# Altium PCB CamController3.PcbDoc
Units mm, origin at the board's own origin, x right, y up, seen from the top; angles counter-clockwise.
Board outline 100 x 100 mm, 2 copper layers (Top Layer, Bottom Layer), stack 1.671 mm thick; 57 components, 96 nets, 410 pads, 51 vias.
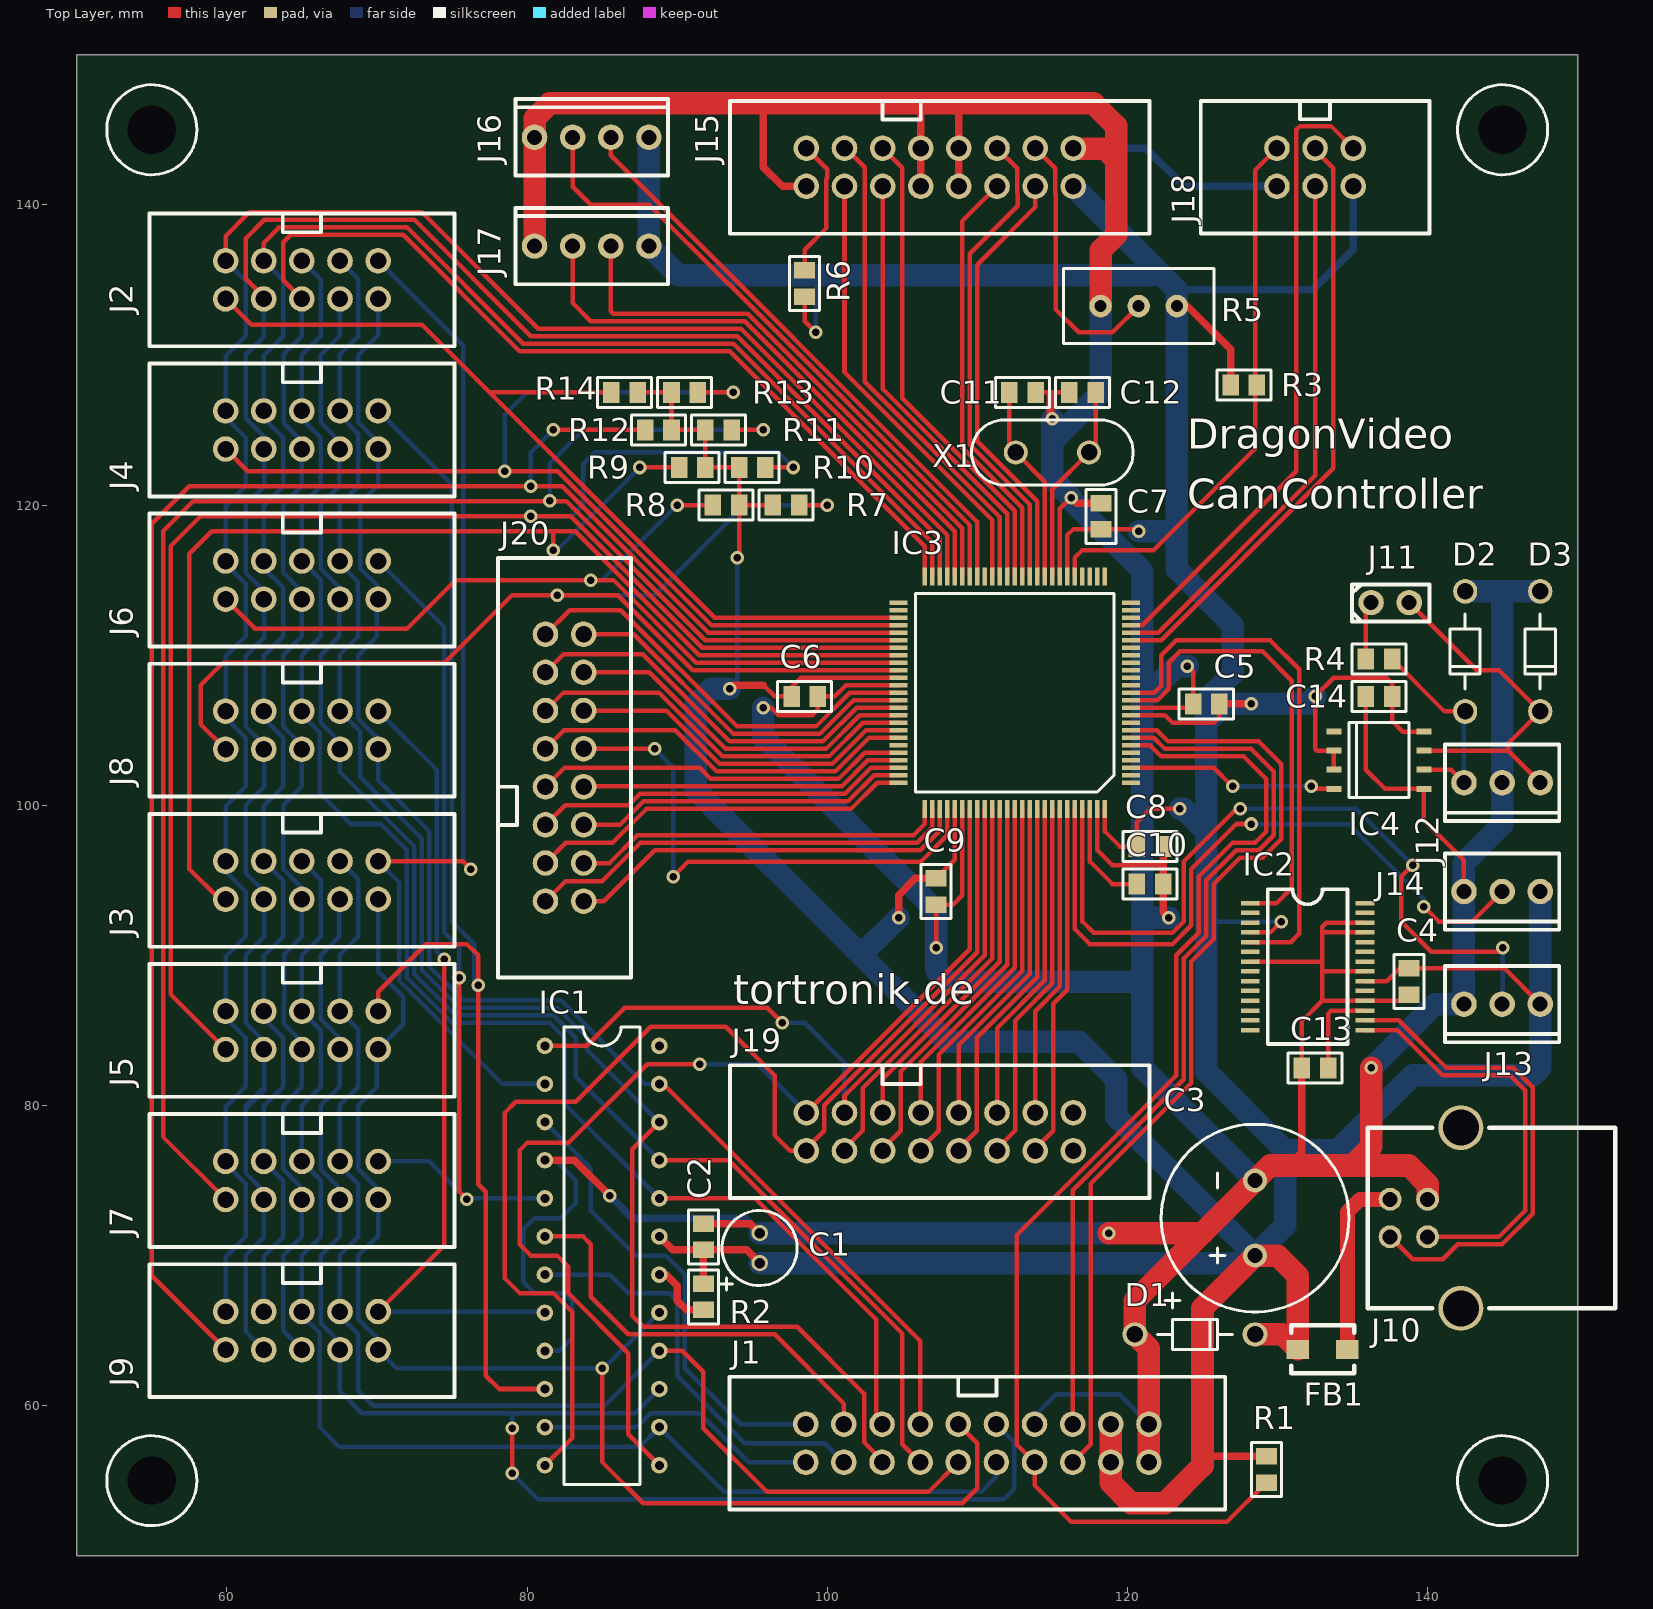
[diagram p0: Top Layer view]
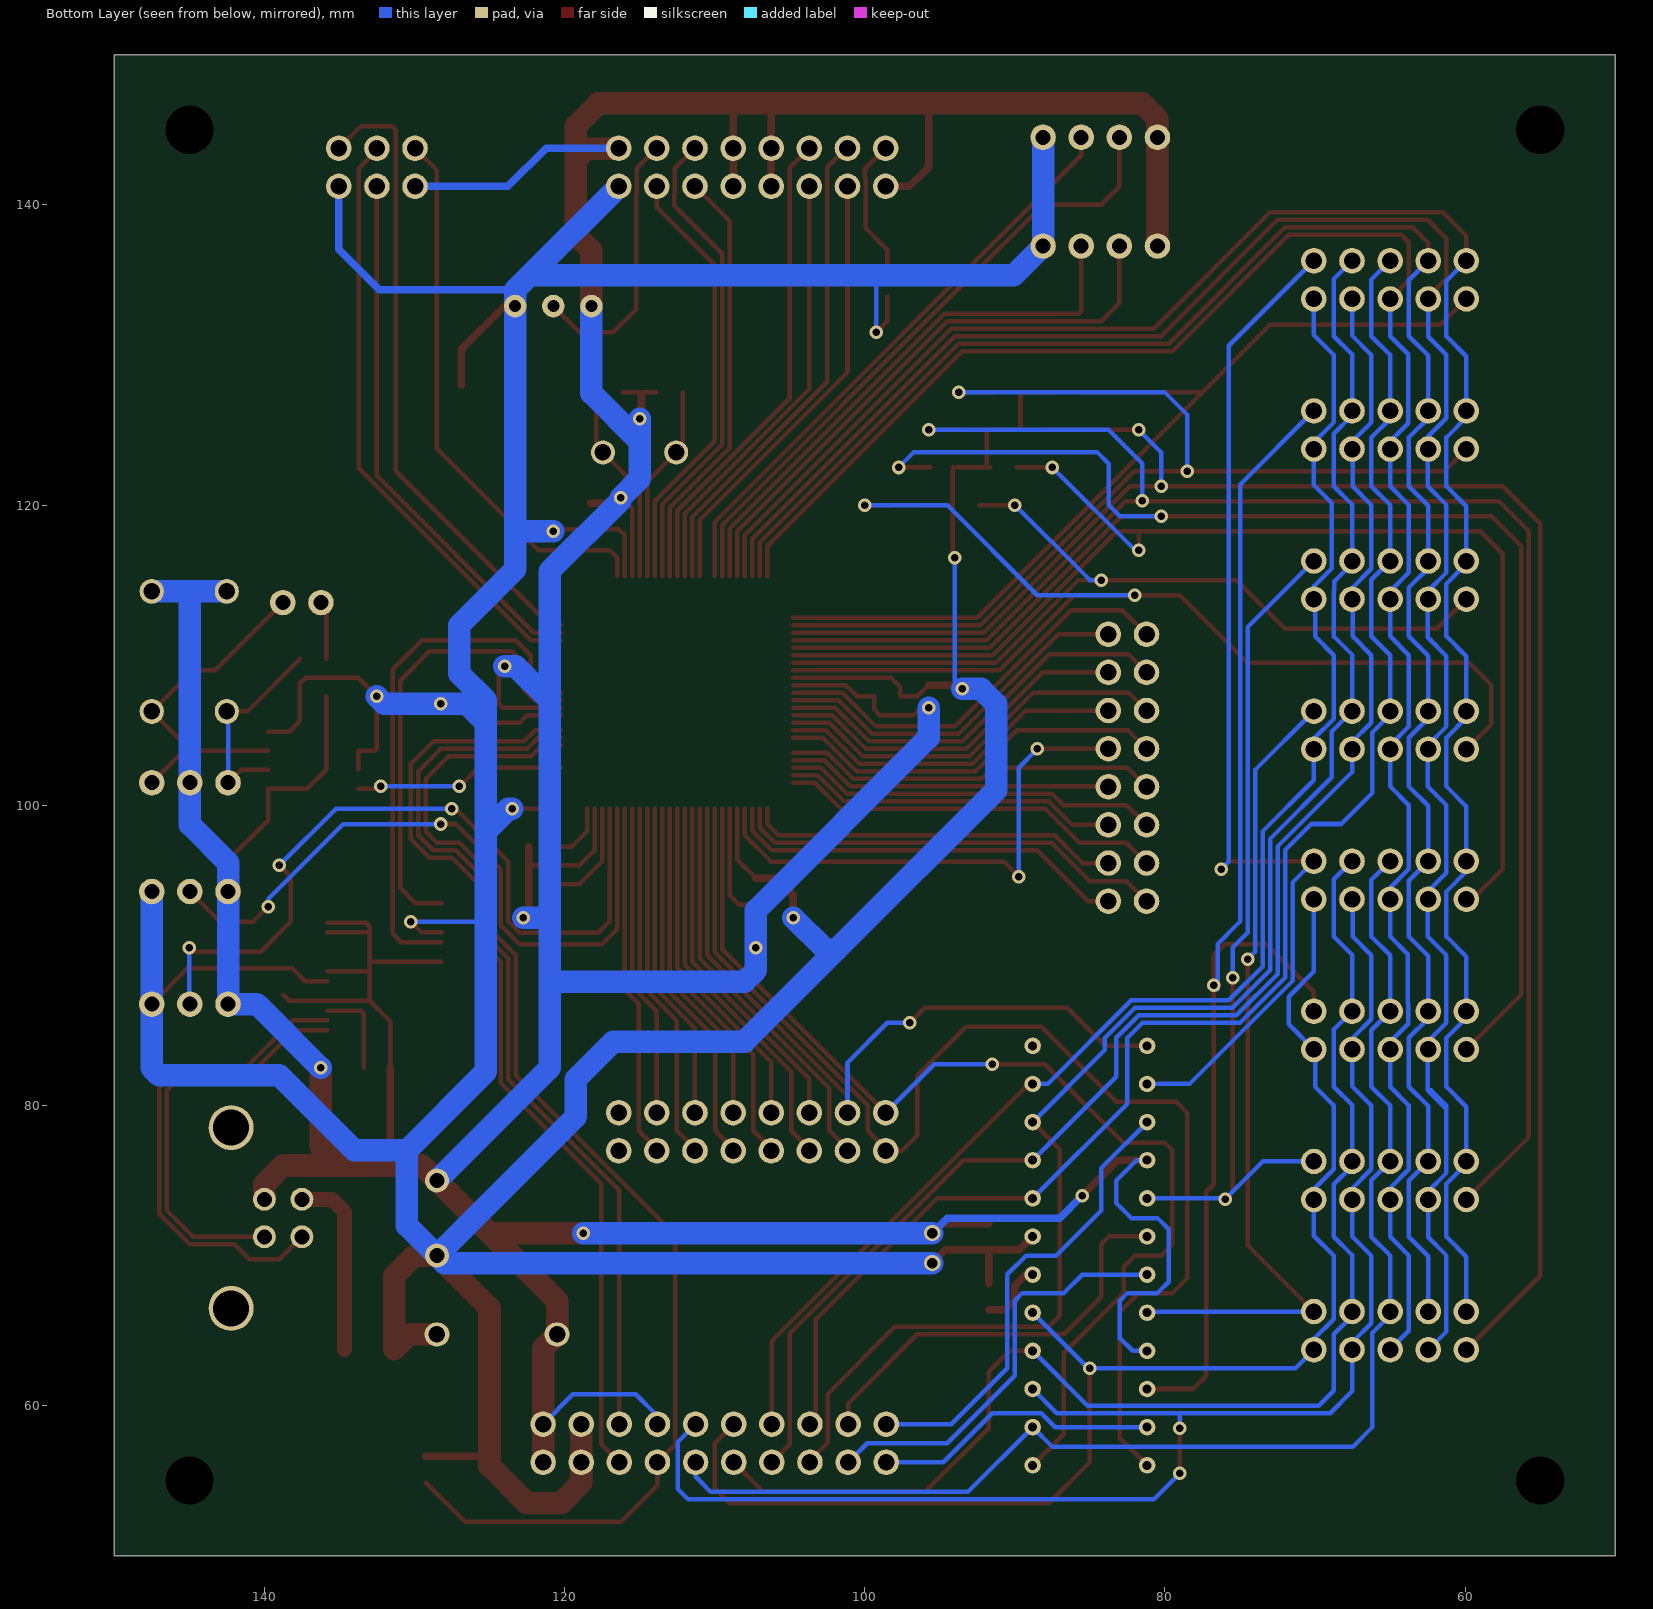
[diagram p1: Bottom Layer view, seen from below]
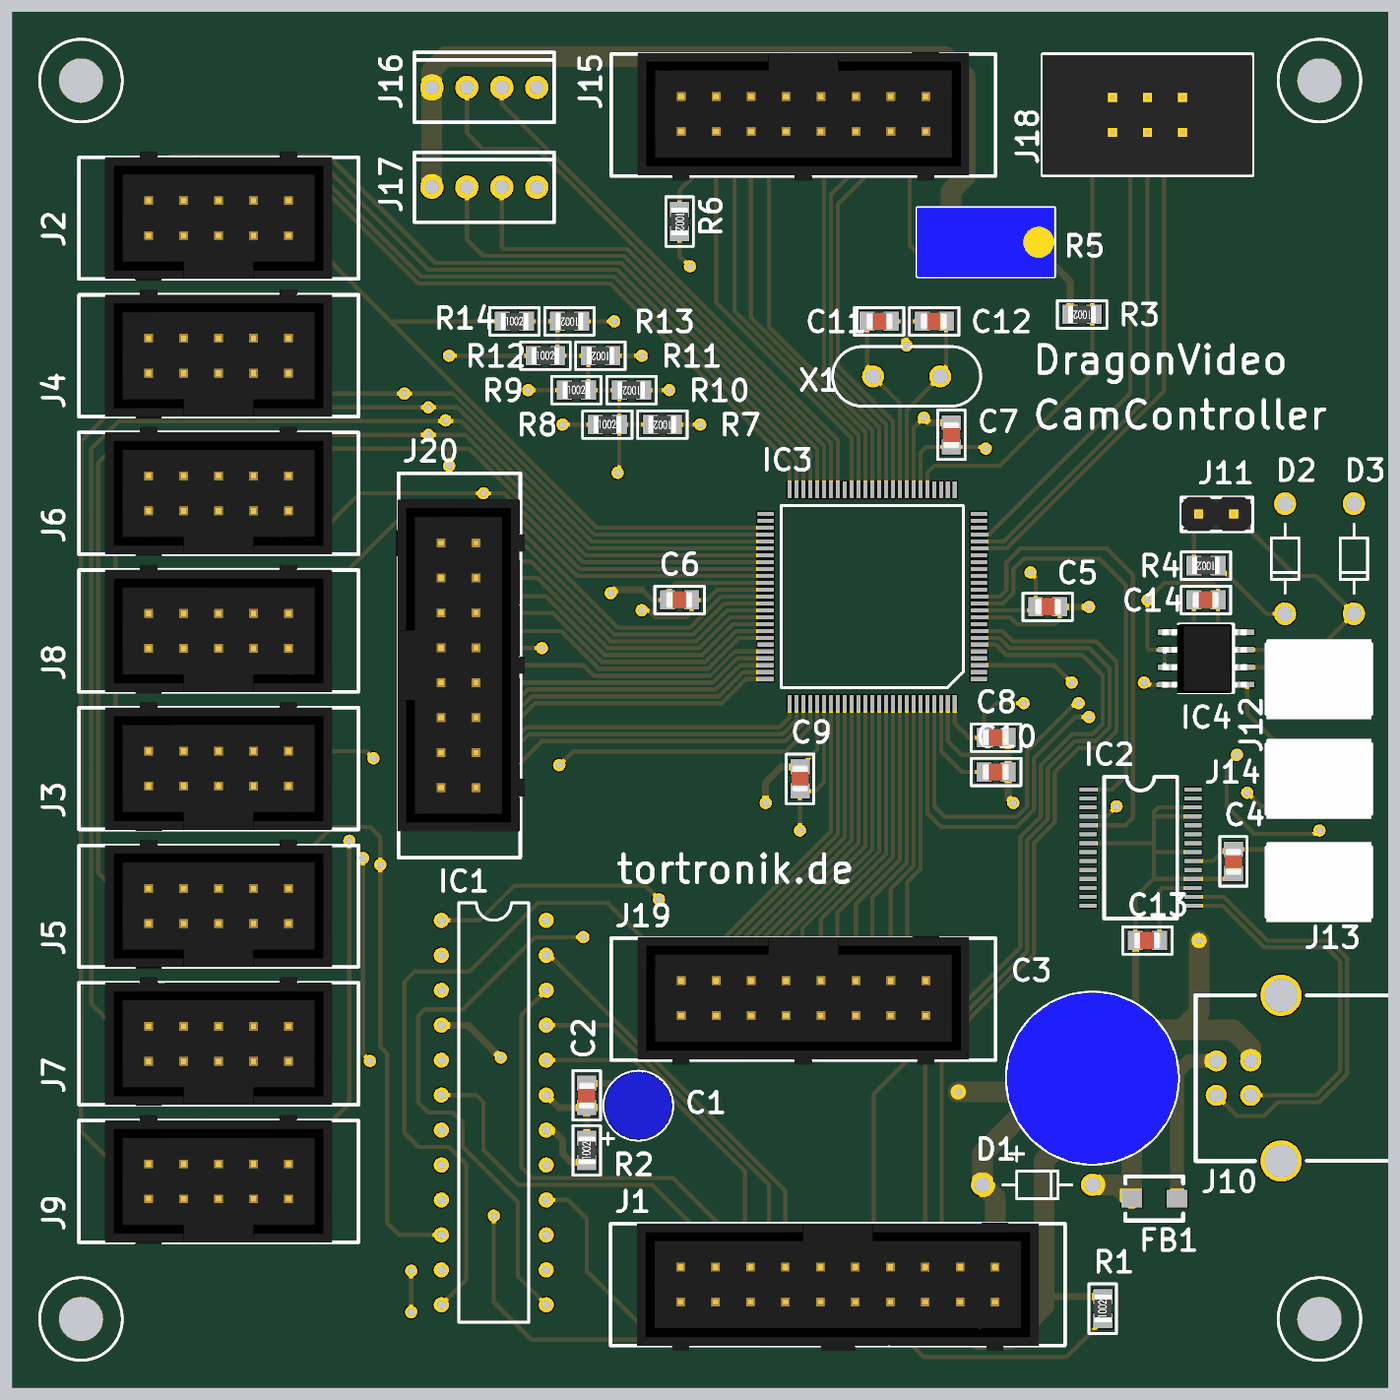
[diagram p2: 3D render of the assembled board from above, using the file's embedded part models]

## Layer stack, top to bottom
Top Solder: solder mask 0.0102, Solder Resist, Dk 3.5
Top Layer: signal copper 0.0356
Dielectric1: core 1.6, FR-4, Dk 4.8
Bottom Layer: signal copper 0.0356
Bottom Solder: solder mask 0.0102, Solder Resist, Dk 3.5

## Board outline
50,50 50,150 150,150 150,50

## Design rules (kind name [scope] priority, off if disabled: settings)
Clearance [All] p1: gap=0.2 ignorepadtopadclearanceinfootprint=FALSE except(0: Arc-Hole Track-Hole SMDPad-Hole THPad-Hole Via-Hole Fill-Hole Poly-Hole Region-Hole Text-Hole)
HoleSize [All] p1: absolutevalues=TRUE maxlimit=6 minlimit=0.25 maxpercent=80.000 minpercent=20.000
PolygonConnect [All] p1: connectstyle=Relief reliefconductorwidth=0.254 reliefentries=4 polygonreliefangle="90 Angle" airgapwidth=0.254
RoutingVias [All] p1: holewidth=0.6 width=1 viastyle="Through Hole" minholewidth=0.3 minwidth=0.6 maxholewidth=1 maxwidth=1.3
SolderMaskExpansion [All] p1: expansion=0.102
Width [All] p1: maxlimit=2 minlimit=0.15 preferedwidth=0.4
29 further rules are at their usual default settings.

## Classes and differential pairs
component class CamController3: C3 C4 C5 C6 C7 C8 C9 C10 C11 C12 C13 C14 D1 D2 D3 FB1 IC2 IC3 IC4 J10 J11 J12 J13 J14 J15 J16 J17 J18 J19 J20 R3 R4 R5 R6 R7 R8 R9 R10 R11 R12 R13 R14 X1
component class Buttoninterface: C1 C2 IC1 J1 J2 J3 J4 J5 J6 J7 J8 J9 R1 R2

## Components (designator, comment, footprint, x,y, rotation, side; value= is the part's Value field where it differs from the comment)
C1 "Elko_10uF_63V" RM2D5H11 95.5,70.5 r90 top
C2 "100nF 50V MLCC 0805" 0805 91.75,71.25 r270 top
C3 "Elko_220uF_50V" RM5D125H20 128.5,72.5 r90 top
C4 "10nF 50V MLCC 0805" 0805 138.75,88.25 r270 top
C5 "100nF 50V MLCC 0805" 0805 125.25,106.75 r0 top
C6 "100nF 50V MLCC 0805" 0805 98.5,107.25 r180 top
C7 "100nF 50V MLCC 0805" 0805 118.25,119.25 r270 top
C8 "100nF 50V MLCC 0805" 0805 121.5,97.25 r180 top
C9 "100nF 50V MLCC 0805" 0805 107.25,94.25 r90 top
C10 "100nF 50V MLCC 0805" 0805 121.5,94.75 r180 top
C11 "22pF 50V MLCC 0805" 0805 113,127.5 r0 top
C12 "22pF 50V MLCC 0805" 0805 117,127.5 r180 top
C13 "100nF 50V MLCC 0805" 0805 132.5,82.5 r180 top
C14 "100nF 50V MLCC 0805" 0805 136.75,107.25 r180 top
D1 "ZD-5W 5,1V" DO-204AF 124.5,64.75 r180 top
D2 "ZD-5W 5,1V" DO-204AF 142.5,110.25 r90 top
D3 "ZD-5W 5,1V" DO-204AF 147.5,110.25 r90 top
FB1 "Feritbead" Ferritbead 133,63.75 r180 top
IC1 "MAX7221" DIL28 85,70 r0 top
IC2 "FT232RL" SSOP-28 132,89.25 r270 top
IC3 "ATMega1280" LQFP100 112.5,107.5 r180 top
IC4 "MAX485CSA" SOIC8 136.75,103 r270 top
J1 "Wannenstecker 20pol 2,54mm" WSL20G 110,57.5 r180 top
J2 "Wannenstecker 10pol 2,54mm" WSL10G 65,135 r180 top
J3 "Wannenstecker 10pol 2,54mm" WSL10G 65,95 r180 top
J4 "Wannenstecker 10pol 2,54mm" WSL10G 65,125 r180 top
J5 "Wannenstecker 10pol 2,54mm" WSL10G 65,85 r180 top
J6 "Wannenstecker 10pol 2,54mm" WSL10G 65,115 r180 top
J7 "Wannenstecker 10pol 2,54mm" WSL10G 65,75 r180 top
J8 "Wannenstecker 10pol 2,54mm" WSL10G 65,105 r180 top
J9 "Wannenstecker 10pol 2,54mm" WSL10G 65,65 r180 top
J10 "USB B" USB_B 137.5,72.5 r90 top
J11 "SL 1X2G 2,54" "SL_1x2 2.54mm" 137.5,113.5 r0 top
J12 "PSS 254/3G" "PSS 3pol" 147.5,101.5 r180 top
J13 "PSS 254/3G" "PSS 3pol" 147.5,86.75 r180 top
J14 "PSS 254/3G" "PSS 3pol" 147.5,94.25 r180 top
J15 "Wannenstecker 16pol 2,54mm" WSL16G 107.5,142.5 r180 top
J16 "PSS 254/4G" "PSS 4pol" 80.5,144.5 r0 top
J17 "PSS 254/4G" "PSS 4pol" 80.5,137.25 r0 top
J18 "Wannenstecker 6pol 2,54mm" WSL6G 132.5,142.5 r180 top
J19 "Wannenstecker 16pol 2,54mm" WSL16G 107.5,78.25 r180 top
J20 "Wannenstecker 16pol 2,54mm" WSL16G 82.5,102.5 r270 top
R1 "10K 125mW 0805" res0805 129.25,55.75 r90 top
R2 "27k 125mW 0805" res0805 91.75,67.25 r90 top
R3 "10K 125mW 0805" res0805 127.75,128 r180 top
R4 "120R 125mW 0805" res0805 136.75,109.75 r180 top
R5 "12Turn" 64W 120.75,133.25 r0 top
R6 "15R 125mW 0805" res0805 98.5,134.75 r270 top
R7 "4k7 125mW 0805" res0805 97.25,120 r180 top
R8 "4k7 125mW 0805" res0805 93.25,120 r0 top
R9 "4k7 125mW 0805" res0805 91,122.5 r0 top
R10 "4k7 125mW 0805" res0805 95,122.5 r180 top
R11 "4k7 125mW 0805" res0805 92.75,125 r180 top
R12 "4k7 125mW 0805" res0805 88.75,125 r0 top
R13 "4k7 125mW 0805" res0805 90.5,127.5 r180 top
R14 "4k7 125mW 0805" res0805 86.5,127.5 r0 top
X1 "8Mhz_HC49U" HC49 115,123.5 r0 top

## Footprints (in the part's own frame and the unit in brackets; to place one, negate y for a bottom-side part, rotate by r counter-clockwise, add the part's x,y. Pads: shape width x height; smd on the part's side, far side on the other; paste and mask are expansions set on the pad)
64W [mm]
  round 1.5 hole 0.8: 1(-2.54,0) 2(0,0) 3(2.54,0)
  silkscreen extent -5,-2.5 5,2.5, body extent -5,-2.5 5,2.5, height 11.5
0805 [mm]
  rect 1.1x1.4 smd: 1(-0.875,0) 2(0.875,0)
  silkscreen extent -1.8,-1 1.8,1, body extent -0.97,-0.62 1.03,0.62, height 0.78
DIL28 [mm]
  round 1.1 hole 0.6: 1(-3.81,13.97) 2(-3.81,11.43) 3(-3.81,8.89) 4(-3.81,6.35) 5(-3.81,3.81) 6(-3.81,1.27) 7(-3.81,-1.27) 8(-3.81,-3.81) 9(-3.81,-6.35) 10(-3.81,-8.89) 11(-3.81,-11.43) 12(-3.81,-13.97) 13(3.81,-13.97) 14(3.81,-11.43) 15(3.81,-8.89) 16(3.81,-6.35) 17(3.81,-3.81) 18(3.81,-1.27) 19(3.81,1.27) 20(3.81,3.81) 21(3.81,6.35) 22(3.81,8.89) 23(3.81,11.43) 24(3.81,13.97)
  silkscreen extent -2.54,-15.24 2.54,15.24
DO-204AF [mm]
  oval 1.66x1.6 hole 1.1: 1(-4,0) 2(4,0)
  silkscreen extent -2.5,-1 2.5,1
Ferritbead [mm]
  rect 1.5x1.27 smd: 1(-1.65,0) 2(1.65,0)
  silkscreen extent -2.1,-1.6 2.1,1.6
HC49 [mm]
  round 1.6 hole 1.1: 1(-2.44,0) 2(2.44,0)
  silkscreen extent -5.38,-2.17 5.38,2.17
LQFP100 [mm]
  rect 1.2x0.3 smd: 1(-7.75,6) 2(-7.75,5.5) 3(-7.75,5) 4(-7.75,4.5) 5(-7.75,4) 6(-7.75,3.5) 7(-7.75,3) 8(-7.75,2.5) 9(-7.75,2) 10(-7.75,1.5) 11(-7.75,1) 12(-7.75,0.5) 13(-7.75,0) 14(-7.75,-0.5) 15(-7.75,-1) 16(-7.75,-1.5) 17(-7.75,-2) 18(-7.75,-2.5) 19(-7.75,-3) 20(-7.75,-3.5) 21(-7.75,-4) 22(-7.75,-4.5) 23(-7.75,-5) 24(-7.75,-5.5) 25(-7.75,-6) 51(7.75,-6) 52(7.75,-5.5) 53(7.75,-5) 54(7.75,-4.5) 55(7.75,-4) 56(7.75,-3.5) 57(7.75,-3) 58(7.75,-2.5) 59(7.75,-2) 60(7.75,-1.5) 61(7.75,-1) 62(7.75,-0.5) 63(7.75,0) 64(7.75,0.5) 65(7.75,1) 66(7.75,1.5) 67(7.75,2) 68(7.75,2.5) 69(7.75,3) 70(7.75,3.5) 71(7.75,4) 72(7.75,4.5) 73(7.75,5) 74(7.75,5.5) 75(7.75,6)
  rect 0.3x1.2 smd: 26(-6,-7.75) 27(-5.5,-7.75) 28(-5,-7.75) 29(-4.5,-7.75) 30(-4,-7.75) 31(-3.5,-7.75) 32(-3,-7.75) 33(-2.5,-7.75) 34(-2,-7.75) 35(-1.5,-7.75) 36(-1,-7.75) 37(-0.5,-7.75) 38(0,-7.75) 39(0.5,-7.75) 40(1,-7.75) 41(1.5,-7.75) 42(2,-7.75) 43(2.5,-7.75) 44(3,-7.75) 45(3.5,-7.75) 46(4,-7.75) 47(4.5,-7.75) 48(5,-7.75) 49(5.5,-7.75) 50(6,-7.75) 76(6,7.75) 77(5.5,7.75) 78(5,7.75) 79(4.5,7.75) 80(4,7.75) 81(3.5,7.75) 82(3,7.75) 83(2.5,7.75) 84(2,7.75) 85(1.5,7.75) 86(1,7.75) 87(0.5,7.75) 88(0,7.75) 89(-0.5,7.75) 90(-1,7.75) 91(-1.5,7.75) 92(-2,7.75) 93(-2.5,7.75) 94(-3,7.75) 95(-3.5,7.75) 96(-4,7.75) 97(-4.5,7.75) 98(-5,7.75) 99(-5.5,7.75) 100(-6,7.75)
  silkscreen extent -6.61,-6.61 6.61,6.61
"PSS 3pol" [mm] "3pol Wire-Board-Connector"
  round 1.7 hole 1: 1(0,0) 2(2.54,0) 3(5.08,0)
  silkscreen extent -1.27,-2.54 6.35,2.54, body extent -1.27,-2.9 6.35,2.9, height 11.4
"PSS 4pol" [mm] "4pol Wire-Board-Connector"
  round 1.7 hole 1: 1(0,0) 2(2.54,0) 3(5.08,0) 4(7.62,0)
  silkscreen extent -1.27,-2.54 8.89,2.54
res0805 [mm]
  rect 1.1x1.4 smd: 1(-0.875,0) 2(0.875,0)
  silkscreen extent -1.8,-1 1.8,1, body extent -0.99,-0.63 1.01,0.62, height 0.5
RM2D5H11 [mm]
  round 1.1 hole 0.7: +(-1,0) -(1,0)
  silkscreen extent -2.8,-2.5 2.5,2.6, body extent -2.48,-2.5 2.5,2.5, height 11
RM5D125H20 [mm]
  round 1.6 hole 1: +(-2.5,0) -(2.5,0)
  silkscreen extent -6.25,-6.25 6.25,6.25, body extent -6.24,-6.2 6.24,6.25, height 20
"SL_1x2 2.54mm" [mm]
  round 1.7 hole 1: 1(-1.27,0) 2(1.27,0)
  silkscreen extent -2.54,-1.26 2.63,1.2, body extent -2.54,-1.25 2.54,1.25, height 8.5
SOIC8 [mm]
  rect 0.4x1 smd: 1(-1.905,-3) 2(-0.635,-3) 3(0.635,-3) 4(1.905,-3) 5(1.905,3) 6(0.635,3) 7(-0.635,3) 8(-1.905,3)
  silkscreen extent -2.5,-2 2.5,2, body extent -2.5,-3.18 2.5,2.98, height 2
SSOP-28 [mm]
  rect 0.3x1.25 smd: 1(-4.225,-3.825) 2(-3.575,-3.825) 3(-2.925,-3.825) 4(-2.275,-3.825) 5(-1.625,-3.825) 6(-0.975,-3.825) 7(-0.325,-3.825) 8(0.325,-3.825) 9(0.975,-3.825) 10(1.625,-3.825) 11(2.275,-3.825) 12(2.925,-3.825) 13(3.575,-3.825) 14(4.225,-3.825) 15(4.225,3.825) 16(3.575,3.825) 17(2.925,3.825) 18(2.275,3.825) 19(1.625,3.825) 20(0.975,3.825) 21(0.325,3.825) 22(-0.325,3.825) 23(-0.975,3.825) 24(-1.625,3.825) 25(-2.275,3.825) 26(-2.925,3.825) 27(-3.575,3.825) 28(-4.225,3.825)
  silkscreen extent -5.15,-2.65 5.15,2.65
USB_B [mm]
  round 1.524 hole 1: 1(1.25,0) 2(-1.25,0) 3(-1.25,-2.5) 4(1.25,-2.5)
  round 3 hole 2.4: 5(-6.02,-4.71) 5(6.02,-4.71)
  silkscreen extent -6.02,-15 6.02,1.5
WSL6G [mm]
  round 1.7 hole 1.1: 1(-2.54,-1.27) 2(-2.54,1.27) 3(0,-1.27) 4(0,1.27) 5(2.54,-1.27) 6(2.54,1.27)
  silkscreen extent -7.62,-4.42 7.62,4.42, body extent -7.62,-4.35 7.62,4.35, height 9
WSL10G [mm]
  round 1.7 hole 1.1: 1(-5.08,-1.27) 2(-5.08,1.27) 3(-2.54,-1.27) 4(-2.54,1.27) 5(0,-1.27) 6(0,1.27) 7(2.54,-1.27) 8(2.54,1.27) 9(5.08,-1.27) 10(5.08,1.27)
  silkscreen extent -10.16,-4.43 10.16,4.43, body extent -8.25,-4.83 8.26,4.55, height 9.27
WSL16G [mm]
  round 1.7 hole 1.1: 1(-8.89,-1.27) 2(-8.89,1.27) 3(-6.35,-1.27) 4(-6.35,1.27) 5(-3.81,-1.27) 6(-3.81,1.27) 7(-1.27,-1.27) 8(-1.27,1.27) 9(1.27,-1.27) 10(1.27,1.27) 11(3.81,-1.27) 12(3.81,1.27) 13(6.35,-1.27) 14(6.35,1.27) 15(8.89,-1.27) 16(8.89,1.27)
  silkscreen extent -13.97,-4.43 13.97,4.43, body extent -12.06,-4.61 12.06,4.76, height 9.27
WSL20G [mm]
  round 1.7 hole 1.1: 1(-11.43,-1.27) 2(-11.43,1.27) 3(-8.89,-1.27) 4(-8.89,1.27) 5(-6.35,-1.27) 6(-6.35,1.27) 7(-3.81,-1.27) 8(-3.81,1.27) 9(-1.27,-1.27) 10(-1.27,1.27) 11(1.27,-1.27) 12(1.27,1.27) 13(3.81,-1.27) 14(3.81,1.27) 15(6.35,-1.27) 16(6.35,1.27) 17(8.89,-1.27) 18(8.89,1.27) 19(11.43,-1.27) 20(11.43,1.27)
  silkscreen extent -16.51,-4.43 16.51,4.43, body extent -14.6,-4.55 14.6,4.83, height 9.27

## Part data
C3: "nichicon"
IC1: library part MAX7221CNG, "8x8 Matrix LED driver"
IC2: library part "FT 232 RL", "USB UART Bridge"
IC3: library part ATmega1280
IC4: "RS485 driver"
J10: library part USB_B
J11: "Stiftleiste 2pol 2.54mm"
J12 J13 J14: "PSS 3pol wire-to-board-connector"
J16 J17: "PSS 4pol wire-to-board-connector"
R5: library part 64W-10K, "trimmer 12turn"
X1: "8Mhz crystal resonator"

## Free pads (board coordinates)
  round 1 hole 3.2: 0(55,55) 0(55,145) 0(145,55) 0(145,145)

## Via types
v1: diameter 0.9, hole 0.5, Top Layer to Bottom Layer, 51 vias

## Nets (pads, with @x,y where several pads share a name; then routed paths per layer and width w, separated by ;. In a path a pad name is that pad's centre, name@x,y a point inside that pad or via, vN(x,y) a via of type N, cw(c..) or ccw(c..) an arc to the next point about the centre after c; other vN are vias at no path point)
5V: C1.+ C2.2 C3.+ C4.1 C5.2 C6.2 C7.2 C8.2 C9.2 C14.1 D1.1 FB1.2 IC1.19 IC2.4 IC2.20 IC3.10 IC3.31 IC3.61 IC3.80 IC3.100 IC4.2 IC4.3 IC4.8 J1.3 J1.4 J13.1 J14.1 J15.2 J16.4 J17.4 J18.2 R1.2 R2.2 R3.2 R5.3 R6.2 R7.2 R8.2 R9.2 R10.2 R11.2 R12.2 R13.2 R14.2 | length 460.4
  Top Layer w0.3: R14.2 R13.2 R12.2 R11.2 R9.2 ; R9.2@91.625,122.5 R10.2@93.875,122.5 ; v1(94,116.5) 94.125,116.625 R10.2 ; R8.2 R7.2 ; 95.75,108 96.5,107.25 C6.2 97.625,107.875 98.25,108.5 IC3.61 ; R6.2 98.5,132.25 v1(99.25,131.5) ; C9.2 108.5,96.375 IC3.80 ; IC3.31 116,116.25 116,118 116.375,118.375 C7.2 120.625,118.375 v1(120.75,118.25) ; IC3.100 118.5,98.25 119.5,97.25 C8.2 120.625,98.875 121.5,99.75 v1(123.5,99.75) ; IC3.10 122.5,106 123,105.5 125.75,105.5 126.125,105.875 C5.2 ; IC2.4 129.525,91.525 v1(130.25,92.25) ; IC4.3 IC4.2 132.615,103.635 132.5,103.75 v1(132.5,107.25) 133.75,108.5 137.25,108.5 137.625,108.125 C14.1 137.625,105.625 138.345,104.905 IC4.8 ; IC2.20 137.275,88.275 138.125,89.125 C4.1 145.125,89.125 J13.1
  Top Layer w0.5: IC1.19 89.705,70.375 C2.2 ; R2.2 C2.2 ; v1(93.5,107.75) 93.75,108 95.75,108 ; C1.+ 94.625,70.375 C2.2 ; v1(104.75,92.5) 104.75,94 105.875,95.125 C9.2 ; R5.3 124,133.25 126.875,130.375 R3.2 ; 125,56.75 125.125,56.625 R1.2 ; C5.2 v1(128.25,106.75)
  Top Layer w1.5: J1.3 J1.4 118.89,54.86 120.25,53.5 122.5,53.5 125,56 125,56.75 125,66.5 C3.+ 130,70 131.35,68.65 FB1.2 130.35,64.75 D1.1
  Bottom Layer w0.3: v1(93.5,107.75) 94,108.25 v1(94,116.5) ; 99,135.31 99.25,135.06 v1(99.25,131.5) ; 125.25,91.5 126,92.25 v1(130.25,92.25)
  Bottom Layer w0.5: 123.29,134.33 132.33,134.33 135.04,137.04 J18.2
  Bottom Layer w1.5: J16.4 J17.4 90.06,135.31 99,135.31 122.31,135.31 ; v1(93.5,107.75) 92.25,107.75 91.25,106.75 91.25,101 101.875,90.375 ; C1.+ 128,69.5 C3.+ ; v1(104.75,92.5) 102.625,90.375 101.875,90.375 ; J15.2 122.31,135.31 ; v1(120.75,118.25) 123.29,118.25 ; v1(123.5,99.75) 123.75,99.75 125.25,98.25 ; v1(132.5,107.25) 132,106.75 v1(128.25,106.75) 126.5,106.75 125.25,105.5 ; J14.1 J13.1 147.5,82.5 147,82 139,82 134,77 130.5,77 ; 101.875,90.375 108,84.25 116.75,84.25 119.25,81.75 119.25,79.25 C3.+ ; 122.31,135.31 123.29,134.33 R5.3 123.29,118.25 ; 123.29,118.25 123.29,115.71 127,112 127,108.75 125.25,107 125.25,105.5 ; 125.25,98.25 125.25,105.5 ; 125.25,98.25 125.25,91.5 125.25,82.25 130.5,77 ; C3.+ 130.5,72 130.5,77
BT_COL0: IC3.50 J2.6 J3.6 J4.6 J5.6 J6.6 J7.6 J8.6 J9.6 | length 135
  Top Layer w0.3: J2.6 63.75,134.98 63.75,137.5 64.25,138 71.75,138 79.5,130.25 93.5,130.25 106,117.75 106.5,117.25 IC3.50
  Bottom Layer w0.3: J9.6 63.75,64.98 63.75,70 65,71.25 J7.6 65,74.5 63.75,75.75 63.75,80 65,81.25 J5.6 65,84.25 63.8,85.45 63.8,86.79 63.823,86.813 63.823,90.073 65,91.25 J3.6 65,94.5 63.75,95.75 63.75,100 65,101.25 J8.6 65,104 63.75,105.25 63.75,110 65,111.25 J6.6 65,114.25 63.75,115.5 63.75,120 65,121.25 J4.6 65,124.25 63.8,125.45 63.8,130.05 65,131.25 J2.6
BT_COL1: IC3.49 J2.7 J3.7 J4.7 J5.7 J6.7 J7.7 J8.7 J9.7 | length 134.6
  Top Layer w0.3: J2.7 62.46,137.46 63.5,138.5 72,138.5 79.75,130.75 93.75,130.75 107,117.5 IC3.49
  Bottom Layer w0.3: J9.7 62.46,69.96 63.75,71.25 63.75,74.98 J7.7 62.46,79.96 63.75,81.25 63.75,84.5 62.46,85.79 J5.7 62.46,89.96 63.75,91.25 63.75,94.98 J3.7 62.46,99.96 63.75,101.25 63.75,104.5 62.46,105.79 J8.7 62.46,109.96 63.75,111.25 63.75,114.5 62.46,115.79 J6.7 62.46,119.96 63.75,121.25 63.75,124.5 62.46,125.79 J4.7 62.46,129.96 63.75,131.25 63.75,134.98 J2.7
BT_COL2: IC3.48 J2.8 J3.8 J4.8 J5.8 J6.8 J7.8 J8.8 J9.8 | length 141.7
  Top Layer w0.3: J2.8 62.46,133.87 61.26,135.07 61.26,137.76 62.5,139 72.5,139 80.25,131.25 94,131.25 107.5,117.75 IC3.48
  Bottom Layer w0.3: J9.8 61.25,64.94 61.25,70 62.46,71.21 J7.8 62.46,74.29 61.25,75.5 61.25,79.75 ; J2.8 62.46,131.21 61.26,130.01 61.26,125.773 62.46,124.573 J4.8 62.5,123.69 62.5,121.25 61.25,120 61.25,115.5 62.46,114.29 J6.8 62.5,113.69 62.5,111.184 61.25,109.934 61.25,105.25 62.46,104.04 J8.8 62.5,103.69 62.5,101.25 61.25,100 61.25,95.5 62.46,94.29 J3.8 62.5,93.69 62.5,91.25 61.25,90 61.25,85.5 62.46,84.29 J5.8 62.5,83.69 62.5,81 ; 61.25,79.75 62.5,81 ; 61.25,79.75 61.25,80 62.25,81 62.5,81
BT_COL3: IC3.47 J2.9 J3.9 J4.9 J5.9 J6.9 J7.9 J8.9 J9.9 | length 139.8
  Top Layer w0.3: J2.9 59.92,137.92 61.5,139.5 73,139.5 80.75,131.75 94.25,131.75 108,118 IC3.47
  Bottom Layer w0.3: J9.9 59.92,69.92 61.25,71.25 61.25,74.793 59.92,76.123 J7.9 59.92,79.92 61.25,81.25 61.25,84.5 59.92,85.83 J5.9 59.92,89.92 61.25,91.25 61.25,94.25 59.92,95.58 J3.9 59.92,99.92 61.25,101.25 61.25,104.5 59.92,105.83 J8.9 59.92,109.92 61.25,111.25 61.25,114.75 59.92,116.08 J6.9 59.92,119.92 61.25,121.25 61.25,124.5 59.92,125.83 J4.9 59.92,129.92 61.25,131.25 61.25,134.94 J2.9
BT_ROW0: IC3.53 J2.10 R14.1 | length 61.7
  Top Layer w0.3: J2.10 61.65,132 73,132 92.5,112.5 IC3.53 ; 77.5,127.5 R14.1
BT_ROW1: IC3.58 J3.10 R9.1 | length 87.2
  Top Layer w0.3: J3.10 59.52,93.73 57.5,95.75 57.5,116.75 59,118.25 81.75,118.25 ; v1(81.75,117) 81.75,118.25 ; v1(87.5,122.5) R9.1@89.875,122.5 ; IC3.58 91.464,110 83.214,118.25 81.75,118.25
  Bottom Layer w0.3: v1(81.75,117) 82,117 v1(87.5,122.5)
BT_ROW2: IC3.54 J4.10 R13.1 | length 71.7
  Top Layer w0.3: J4.10 61.4,122.25 v1(78.5,122.25) 82.043,122.25 92.293,112 IC3.54 ; R13.1 v1(93.75,127.5)
  Bottom Layer w0.3: v1(78.5,122.25) 78.5,126 80,127.5 v1(93.75,127.5)
BT_ROW3: IC3.57 J5.10 R10.1 | length 111.4
  Top Layer w0.3: J5.10 56.25,87.4 56.25,117.25 58.25,119.25 v1(80.25,119.25) 82.922,119.25 91.672,110.5 IC3.57 ; R10.1@95.625,122.5 v1(97.75,122.5)
  Bottom Layer w0.3: v1(80.25,119.25) 83,119.25 83.75,120 83.75,122.75 84.5,123.5 96.75,123.5 v1(97.75,122.5)
BT_ROW4: IC3.59 J6.10 R8.1 | length 59.5
  Top Layer w0.3: J6.10 61.9,111.75 72,111.75 75.25,115 v1(84.25,115) 85.757,115 91.257,109.5 IC3.59 ; v1(90,120) R8.1
  Bottom Layer w0.3: v1(84.25,115) 85,115 v1(90,120)
BT_ROW5: IC3.56 J7.10 R11.1 | length 119.7
  Top Layer w0.3: J7.10 55.75,77.9 55.75,118.25 57.75,120.25 82.629,120.25 91.879,111 IC3.56 ; R11.1 v1(95.75,125)
  Bottom Layer w0.3: v1(81.5,120.3) 81.5,122.75 83.75,125 v1(95.75,125)
BT_ROW6: IC3.60 J8.10 R7.1 | length 78.4
  Top Layer w0.3: J8.10 58.25,105.4 58.25,108 59.75,109.5 74.5,109.5 79,114 v1(82,114) 86.05,114 91.05,109 IC3.60 ; R7.1 v1(100,120)
  Bottom Layer w0.3: v1(82,114) 88.5,114 94.5,120 v1(100,120)
BT_ROW7: IC3.55 J9.10 R12.1 | length 122.4
  Top Layer w0.3: J9.10 55,68.65 55,118.75 57.5,121.25 v1(80.25,121.25) 82.336,121.25 92.086,111.5 IC3.55 ; v1(81.75,125) R12.1
  Bottom Layer w0.3: v1(80.25,121.25) 80.25,123.5 v1(81.75,125)
GND: C1.- C2.1 C3.- C4.2 C5.1 C6.1 C7.1 C8.1 C9.1 C10.1 C11.2 C12.2 C13.2 C14.2 D1.2 D2.2 D3.2 IC1.4 IC1.9 IC2.7 IC2.18 IC2.21 IC2.25 IC2.26 IC3.11 IC3.32 IC3.62 IC3.81 IC3.99 IC4.5 J1.1 J1.2 J1.7 J10.4 J12.2 J13.3 J14.3 J15.1 J15.7 J15.8 J15.9 J15.10 J15.16 J16.1 J17.1 J18.6 R5.1 | length 477.3
  Top Layer w0.3: v1(95.75,106.5) 96.25,106.5 96.75,106 99,106 99.375,106.375 C6.1 100.5,107.25 101.25,108 IC3.62 ; v1(107.25,90.5) C9.1 108.375,93.375 109,94 IC3.81 ; C11.2 114.75,127.5 v1@114.75,125.75 ; v1(115,125.75) 115,127.5 C12.2 ; IC3.32 115.5,119.75 v1(116.25,120.5) ; IC3.99 118,97 119,96 122.375,96 ; IC3.11 124.125,106.5 C5.1 124.375,108.875 v1(124,109.25) ; IC2.7 132.9,89.575 132.975,89.5 ; C13.2 131.625,85.625 132.975,86.975 ; IC2.21 133.05,88.925 132.975,89 ; IC2.25 133,91.525 132.975,91.5 ; IC2.26 133.25,92.175 132.975,91.9 132.975,91.5 ; C14.2 135.875,102.375 137.155,101.095 IC4.5 139.75,99 142.42,96.33 J14.3 ; C4.2 138.35,86.975 IC2.18 132.975,86.975 ; 132.975,86.975 132.975,89 ; 132.975,89 132.975,89.5 ; 132.975,89.5 132.975,91.5
  Top Layer w0.5: IC1.4 83.15,76.35 v1(85.5,74) ; C2.1 94.875,72.125 C1.- ; 95.75,146.75 95.75,142.5 97.02,141.23 J15.16 ; J15.10 J15.9 106.23,146.73 106.25,146.75 ; J15.8 J15.7 108.77,146.52 109,146.75 ; v1(116.25,120.5) 116.625,120.125 C7.1 ; C8.1 122.375,96 C10.1 122.375,92.875 v1(122.75,92.5) ; 130.75,76 131.625,76.875 C13.2
  Top Layer w1.5: J17.1 J16.1 80.5,145.75 81.5,146.75 95.75,146.75 106.25,146.75 109,146.75 117.75,146.75 119.25,145.25 119.25,143 ; J15.1 116.41,143.75 118.5,143.75 119.25,143 ; R5.1 118.21,136.96 119.25,138 119.25,143 ; v1(118.75,71.5) 125,71.5 ; J1.2 J1.1 121.43,63.82 D1.2 120.5,67 125,71.5 ; v1(136.25,82.5) 136.25,77.25 135,76 ; J10.4 140,74.75 138.75,76 135,76 ; 125,71.5 C3.- 129.5,76 130.75,76 135,76
  Bottom Layer w0.3: IC1.9 82.15,63.65 83,64.5 83,67 82.5,67.5 80.5,67.5 79.75,68.25 79.75,71.75 80.5,72.5 82.25,72.5 83.25,73.5 83.25,75 81.9,76.35 IC1.4 ; J1.7 113.81,59.31 115.25,60.75 119.45,60.75 J1.1
  Bottom Layer w0.5: v1(85.5,74) 87,72.5 94.5,72.5 C1.- ; J15.1 121.23,143.77 123.77,141.23 J18.6
  Bottom Layer w1.5: C1.- v1(118.75,71.5) ; v1(95.75,106.5) 95.75,104.5 107.25,93 v1(107.25,90.5) 107.25,89 108,88.25 121,88.25 ; v1(115,125.75) 115,124.25 ; R5.1 118.21,127.46 115,124.25 ; v1(122.75,92.5) 121,92.5 ; v1(124,109.25) 123.25,109.25 121,107 ; C3.- 121,82.5 121,88.25 ; v1(136.25,82.5) 140.5,86.75 J13.3 J14.3 142.42,96.17 144.96,98.71 J12.2 144.96,114.21 ; D2.2 144.92,114.25 144.96,114.21 ; D3.2 145,114.25 144.96,114.21 ; 115,124.25 115,121.75 v1(116.25,120.5) 116.25,120.346 121,115.596 121,107 ; 121,88.25 121,92.5 ; 121,92.5 121,107
LCD_D4: IC3.38 J15.11 | length 32.2
  Top Layer w0.3: J15.11 105,142.46 105,127.121 112.5,119.621 IC3.38
LCD_D5: IC3.39 J15.12 | length 29.4
  Top Layer w0.3: J15.12 103.69,127.724 112,119.414 IC3.39
LCD_D6: IC3.40 J15.13 | length 32.9
  Top Layer w0.3: J15.13 101.23,143.77 102.49,142.51 102.49,128.217 111.5,119.207 IC3.40
LCD_D7: IC3.41 J15.14 | length 30.1
  Top Layer w0.3: J15.14 101.15,128.85 111,119 IC3.41
LCD_E: IC3.37 J15.6 | length 28.6
  Top Layer w0.3: J15.6 109,138.92 109,123.828 113,119.828 IC3.37
LCD_RS: IC3.35 J15.4 | length 29.2
  Top Layer w0.3: J15.4 113.85,139.85 110,136 110,124.243 114,120.243 IC3.35
LCD_RW: IC3.36 J15.5 | length 32.1
  Top Layer w0.3: J15.5 112.65,142.43 112.65,140.733 112.691,140.691 112.691,139.941 109.5,136.75 109.5,124.036 113.5,120.036 IC3.36
LED_A0: IC1.23 J1.13 J2.2 J4.2 J6.2 J8.2 | length 97.7
  Top Layer w0.3: IC1.23 89.07,81.43 106.19,64.31 J1.13
  Bottom Layer w0.3: J2.2 70.08,131.33 68.75,130 68.75,125.5 70.08,124.17 J4.2 70.08,121.33 68.88,120.13 68.88,115.773 70.08,114.573 J6.2 70,113.65 70,111.25 68.75,110 68.75,105.75 70.08,104.42 J8.2 70.08,101.67 73.5,98.25 73.5,89.25 75.75,87 82.25,87 87.82,81.43 IC1.23
LED_A1: IC1.22 J1.16 J2.3 J4.3 J6.3 J8.3 | length 109.3
  Top Layer w0.3: IC1.22 87,77.08 87,66 87.75,65.25 98,65.25 102.45,60.8 102.45,57.57 103.65,56.37 J1.16
  Bottom Layer w0.3: J2.3 68.75,135.06 68.75,131.25 67.54,130.04 J4.3 67.54,125.96 68.75,124.75 68.75,121.25 67.54,120.04 J6.3 67.54,116.084 68.717,114.907 68.717,114.273 68.74,114.25 68.74,111.24 67.54,110.04 J8.3 67.54,106.253 68.88,104.913 68.88,101.87 73,97.75 73,89 75.5,86.5 82,86.5 84,84.5 84,83.7 IC1.22
LED_A2: IC1.21 J1.14 J2.4 J4.4 J6.4 J8.4 | length 103.2
  Top Layer w0.3: IC1.21 93.443,76.35 104.99,64.803 104.99,57.43 J1.14
  Bottom Layer w0.3: J2.4 67.54,131.29 66.25,130 66.25,125.5 67.54,124.21 J4.4 67.5,123.69 67.5,121.25 66.25,120 66.25,115.75 67.54,114.46 J6.4 67.5,113.69 67.5,111.25 66.25,110 66.25,105.5 67.54,104.21 J8.4 67.54,102.21 72.5,97.25 72.5,88.75 75.25,86 81.75,86 83.25,84.5 83.25,81.91 IC1.21
LED_A3: IC1.20 J1.15 J2.5 J4.5 J6.5 J8.5 | length 105.4
  Top Layer w0.3: IC1.20 95.19,73.81 103.25,65.75 103.25,59.17 J1.15
  Bottom Layer w0.3: J2.5 66.25,135.02 66.25,131.25 65,130 J4.5 65,125.75 66.25,124.5 66.25,121.25 65,120 J6.5 66.25,115.02 66.25,111.25 65,110 J8.5 65,106.043 66.2,104.843 66.2,101.523 66.177,101.5 66.177,100.823 68.25,98.75 70.25,98.75 72,97 72,88.5 75,85.5 81.5,85.5 82.5,84.5 82.5,80.12 IC1.20
LED_A4: IC1.17 J1.11 J3.2 J5.2 J7.2 J9.2 | length 92
  Top Layer w0.3: v1(85,62.5) 85,56.25 87.75,53.5 109,53.5 110,54.5 110,57.5 J1.11
  Bottom Layer w0.3: J3.2 70.08,88.92 71.75,87.25 71.75,85.4 J5.2 70,83.65 70,81.25 68.75,80 68.75,75.75 70.08,74.42 J7.2 70.08,71.33 68.75,70 68.75,65.767 70.08,64.437 J9.2 71.31,62.5 v1(85,62.5) 85.12,62.5 IC1.17
LED_A5: IC1.16 J1.12 J3.3 J5.3 J7.3 J9.3 | length 87.6
  Top Layer w0.3: IC1.16 90.35,63.65 91.75,62.25 91.75,58.5 96,54.25 106.75,54.25 J1.12
  Bottom Layer w0.3: J3.3 68.75,95.06 68.75,91.25 67.54,90.04 J5.3 68.75,85.06 68.75,81.25 67.54,80.04 J7.3 67.54,75.96 68.75,74.75 68.75,71.25 67.54,70.04 J9.3 67.54,65.96 68.75,64.75 68.75,61 69.75,60 85.16,60 IC1.16
LED_A6: IC1.15 J1.9 J3.4 J5.4 J7.4 J9.4 | length 101.8
  Top Layer w0.3: v1(79,55.5) v1(79,58.5)
  Bottom Layer w0.3: J3.4 67.5,93.69 67.5,91.25 66.25,90 66.25,85.75 67.54,84.46 J5.4 67.54,81.29 66.25,80 66.25,75.75 67.54,74.46 J7.4 67.54,71.29 66.25,70 66.25,65.5 67.54,64.21 J9.4 67.54,60.96 69,59.5 79,59.5 ; v1(79,55.5) 80.75,53.75 111.75,53.75 112.47,54.47 112.47,57.57 J1.9 ; v1(79,58.5) 79,59.5 ; IC1.15 87.2,59.5 79,59.5
LED_A7: IC1.14 J1.10 J3.5 J5.5 J7.5 J9.5 | length 90.7
  Bottom Layer w0.3: J3.5 66.25,95.02 66.25,91.25 65,90 J5.5 66.25,85.02 66.25,81.25 65,80 J7.5 66.25,75.02 66.25,71.25 65,70 J9.5 65,66.043 66.2,64.843 66.2,63.233 66.177,63.21 66.177,58.573 67.5,57.25 87.49,57.25 IC1.14 93.13,54.25 110.25,54.25 111.27,55.27 J1.10
LED_K0: IC1.3 J1.19 | length 31
  Bottom Layer w0.3: IC1.3 84.25,75.83 84.25,73 87.25,70 89.25,70 90.5,68.75 90.5,62.5 94.23,58.77 J1.19
LED_K1: IC1.11 J1.20 | length 19.1
  Bottom Layer w0.3: IC1.11 87.32,58.57 88.25,59.5 91.5,59.5 94.77,56.23 J1.20
LED_K2: IC1.6 J1.17 | length 28
  Top Layer w0.3: IC1.6 83.73,71.27 84.25,70.75 84.25,67.25 86.75,64.75 96.5,64.75 101.11,60.14 J1.17
LED_K3: IC1.7 J1.18 | length 28
  Bottom Layer w0.3: IC1.7 85.52,68.73 86.75,67.5 89.5,67.5 90,67 90,62 94.5,57.5 99.84,57.5 J1.18
LED_K4: IC1.2 J2.1 J3.1 | length 70.6
  Top Layer w0.3: J3.1 75.73,96.27 v1(76.25,95.75)
  Bottom Layer w0.3: J3.1 71.5,94.85 71.5,92 71.5,88.293 78.363,81.43 IC1.2 ; J2.1 75.75,130.6 75.75,96.25 v1(76.25,95.75)
LED_K5: IC1.10 J4.1 J5.1 | length 83.4
  Top Layer w0.3: J5.1 70.08,87.58 73.25,90.75 76,90.75 76.75,90 v1(76.75,88) 76.75,74.75 77.25,74.25 77.25,62 78.14,61.11 IC1.10
  Bottom Layer w0.3: J4.1 75,121.35 75,92.25 76.5,90.75 v1@76.5,88 ; v1@76.5,87.75 v1(76.75,88)
LED_K6: IC1.5 J6.1 J7.1 | length 57
  Top Layer w0.3: v1(75.5,88.5) 75.5,74.25 v1(76,73.75)
  Bottom Layer w0.3: J7.1 73.48,76.27 v1@75.94,73.81 ; J6.1 74.5,111.85 74.5,91.5 75.5,90.5 v1(75.5,88.5) ; v1@76,73.81 IC1.5
LED_K7: IC1.8 J8.1 J9.1 | length 54.8
  Top Layer w0.3: J9.1 74.5,70.69 v1(74.5,89.75)
  Bottom Layer w0.3: J9.1 81.11,66.27 IC1.8 ; J8.1 74,102.35 74,90.25 v1(74.5,89.75)
MAX_CLK: IC1.13 IC3.82 J19.15 | length 73.4
  Top Layer w0.3: IC1.13 86.75,58.09 86.75,63.5 82.75,67.5 82.75,69.25 82,70 80.25,70 79.5,70.75 79.5,77 80,77.5 82.75,77.5 88,82.75 v1(91.5,82.75) ; J19.15 109.5,90.41 IC3.82
  Bottom Layer w0.3: v1(91.5,82.75) 95.38,82.75 J19.15
MAX_DIN: IC1.1 IC3.84 J19.13 | length 50
  Top Layer w0.3: IC1.1 83.97,83.97 86.5,86.5 96,86.5 v1(97,85.5) ; J19.13 101.15,80.646 110.5,89.996 IC3.84
  Bottom Layer w0.3: v1(97,85.5) 98.5,85.5 101.15,82.85 J19.13
MAX_LOAD: IC1.12 IC3.83 J19.16 | length 83.2
  Top Layer w0.3: IC1.12 83,57.84 83,66.25 81.75,67.5 79.5,67.5 78.5,68.5 78.5,79.5 79.25,80.25 83.25,80.25 88.25,85.25 93.25,85.25 96.5,82 96.5,78 97.52,76.98 J19.16 98.61,77.12 99.81,78.32 99.81,80.013 110,90.203 IC3.83
MISO: IC3.22 J18.1 | length 42.5
  Top Layer w0.3: IC3.22 120.995,112 131.25,122.255 131.25,145 131.5,145.25 133.56,145.25 J18.1
MOSI: IC3.21 J18.4 | length 35.9
  Top Layer w0.3: IC3.21 122.043,111.5 132.5,121.957 J18.4
NetC10_2: C10.2 IC3.98 | length 7.2
  Top Layer w0.3: IC3.98 117.5,96.25 119,94.75 C10.2
NetC11_1: C11.1 IC3.34 X1.1 | length 13.2
  Top Layer w0.3: C11.1 112.125,123.935 X1.1 114.5,121.56 IC3.34
NetC12_1: C12.1 IC3.33 X1.2 | length 13.4
  Top Layer w0.3: IC3.33 115,121.06 X1.2 117.875,123.935 C12.1
NetC13_1: C13.1 IC2.17 | length 6.2
  Top Layer w0.3: C13.1 133.375,86.125 133.575,86.325 IC2.17
NetD2_1: D2.1 IC4.6 J12.3 R4.1 | length 14.1
  Top Layer w0.3: R4.1 141.125,106.25 D2.1 ; IC4.6 141.555,102.365 J12.3
  Bottom Layer w0.3: J12.3 142.42,106.17 D2.1
NetD3_1: D3.1 IC4.7 J11.2 J12.1 | length 23.9
  Top Layer w0.3: J11.2 143.27,109 144.75,109 D3.1 145.365,104.115 145.365,103.635 ; IC4.7 145.365,103.635 ; J12.1 145.365,103.635
NetFB1_1: FB1.1 J10.1 | length 12.4
  Top Layer w1: FB1.1 134.65,72.9 135.5,73.75 J10.1
NetIC1_18: IC1.18 R2.1 | length 4.5
  Top Layer w0.5: IC1.18 89.27,68.73 90,68 90,67 90.625,66.375 R2.1
NetIC2_1: IC2.1 IC3.12 | length 30.9
  Top Layer w0.3: IC3.12 122,107 122.75,107.75 122.75,109.5 123.5,110.25 129,110.25 130.95,108.3 130.95,94.5 129.925,93.475 IC2.1
NetIC2_5: IC2.5 IC3.13 | length 35.8
  Top Layer w0.3: IC3.13 121.793,107.5 122.25,107.957 122.25,110 123.25,111 129.5,111 131.45,109.05 131.45,91.45 130.875,90.875 IC2.5
NetIC2_15: IC2.15 J10.3 | length 27.6
  Top Layer w0.3: IC2.15 137.975,85.025 141,82 145.5,82 146.5,81 146.5,73 144.75,71.25 J10.3
NetIC2_16: IC2.16 J10.2 | length 32.8
  Top Layer w0.3: IC2.16 138.075,85.675 141.25,82.5 145.707,82.5 147,81.207 147,72.793 144.957,70.75 142,70.75 141,69.75 139,69.75 J10.2
NetIC3_3: IC3.3 IC4.4 | length 14.1
  Top Layer w0.3: IC3.3 125.75,102.5 v1(127,101.25) ; v1(132.25,101.25) 132.405,101.095 IC4.4
  Bottom Layer w0.3: v1(127,101.25) v1(132.25,101.25)
NetIC3_43: IC3.43 J16.3 | length 39.4
  Top Layer w0.3: J16.3 85.58,143.291 110,118.871 IC3.43
NetIC3_44: IC3.44 J16.2 | length 42.5
  Top Layer w0.3: J16.2 83.04,141.21 84.25,140 88.13,140 93.43,134.7 93.464,134.7 109.5,118.664 IC3.44
NetIC3_45: IC3.45 J17.3 | length 36.9
  Top Layer w0.3: J17.3 85.58,132.92 85.75,132.75 91.371,132.75 94.707,132.75 109,118.457 IC3.45
NetIC3_46: IC3.46 J17.2 | length 38.6
  Top Layer w0.3: J17.2 83.04,133.46 84.25,132.25 91.578,132.25 94.5,132.25 108.5,118.25 IC3.46
NetIC3_96: IC3.96 J14.2 | length 46.2
  Top Layer w0.3: IC3.96 116.5,91.75 117.5,90.75 123,90.75 124.25,92 124.25,95.75 127.25,98.75 v1(128.25,98.75) ; v1(139.75,93.25) 140.75,92.25 142.96,92.25 J14.2
  Bottom Layer w0.3: v1(128.25,98.75) 134.75,98.75 139.75,93.75 v1(139.75,93.25)
NetIC3_97: IC3.97 J13.2 | length 52.6
  Top Layer w0.3: IC3.97 117,92.25 117.75,91.5 123,91.5 123.75,92.25 123.75,96.25 127.25,99.75 v1(127.5,99.75) ; v1(139,96) 138.25,95.25 138.25,92.25 140.25,90.25 144.75,90.25 v1(145,90.5)
  Bottom Layer w0.3: v1(127.5,99.75) 135.25,99.75 v1(139,96) ; J13.2 145,86.79 v1(145,90.5)
NetJ11_1: J11.1 R4.2 | length 3.9
  Top Layer w0.3: R4.2 135.875,113.145 J11.1
NetJ15_3: J15.3 R5.2 | length 18.2
  Top Layer w0.3: J15.3 115.19,142.43 115.19,140.733 115.211,140.711 115.211,133.039 116.75,131.5 119,131.5 R5.2
NetJ15_15: J15.15 R6.1 | length 9.3
  Top Layer w0.3: R6.1 98.5,137 99.95,138.45 99.95,141.727 100,141.777 100,142.38 J15.15
PA0: IC3.78 J20.16 | length 27.1
  Top Layer w0.3: J20.16 85.11,93.61 88.5,97 106.207,97 107.5,98.293 IC3.78
PA1: IC3.77 J20.15 | length 29
  Top Layer w0.3: J20.15 82.57,94.95 85.007,94.95 87.557,97.5 106,97.5 107,98.5 IC3.77
PA2: IC3.76 J20.14 | length 24.8
  Top Layer w0.3: J20.14 85.5,96.15 87.35,98 105.75,98 106.5,98.75 IC3.76
PA3: IC3.75 J20.13 | length 25.7
  Top Layer w0.3: J20.13 82.57,97.49 85.697,97.49 87.957,99.75 101.578,99.75 103.328,101.5 IC3.75
PA4: IC3.74 J20.12 | length 22.4
  Top Layer w0.3: J20.12 86.19,98.69 87.75,100.25 101.371,100.25 103.121,102 IC3.74
PA5: IC3.73 J20.11 | length 25.1
  Top Layer w0.3: J20.11 82.54,100 86.75,100 87.5,100.75 98.25,100.75 101.164,100.75 102.914,102.5 IC3.73
PA6: IC3.72 J20.10 | length 21.7
  Top Layer w0.3: J20.10 83.79,101.25 100.957,101.25 102.707,103 IC3.72
PA7: IC3.71 J20.9 | length 25.1
  Top Layer w0.3: J20.9 82.5,102.5 91.5,102.5 92.25,101.75 100.75,101.75 102.5,103.5 IC3.71
PF2: IC3.95 J19.4 | length 23.7
  Top Layer w0.3: J19.4 113.85,77.12 115.05,78.32 115.05,86.768 116,87.718 IC3.95
PF3: IC3.94 J19.3 | length 20.9
  Top Layer w0.3: J19.3 113.85,86.275 115.5,87.925 IC3.94
PF4: IC3.93 J19.6 | length 24.3
  Top Layer w0.3: J19.6 111.31,77.12 112.51,78.32 112.51,85.642 115,88.132 IC3.93
PF5: IC3.92 J19.5 | length 21.6
  Top Layer w0.3: J19.5 111.31,85.149 114.5,88.339 IC3.92
PF6: IC3.91 J19.8 | length 24.9
  Top Layer w0.3: J19.8 108.77,77.12 109.97,78.32 109.97,84.516 114,88.546 IC3.91
PF7: IC3.90 J19.7 | length 22.2
  Top Layer w0.3: J19.7 108.77,84.023 113.5,88.753 IC3.90
PJ0: IC3.63 J20.1 | length 28.3
  Top Layer w0.3: J20.1 82.84,113 86.25,113 94,105.25 99.25,105.25 101.5,107.5 IC3.63
PJ1: IC3.64 J20.2 | length 24.7
  Top Layer w0.3: J20.2 87.11,111.39 93.75,104.75 99.5,104.75 101.75,107 IC3.64
PJ2: IC3.65 J20.3 | length 27.4
  Top Layer w0.3: J20.3 82.43,110.05 87.7,110.05 93.5,104.25 99.707,104.25 101.957,106.5 IC3.65
PJ3: IC3.66 J20.4 | length 24
  Top Layer w0.3: J20.4 88.15,108.85 93.25,103.75 99.914,103.75 102.164,106 IC3.66
PJ4: IC3.67 J20.5 | length 26.7
  Top Layer w0.3: J20.5 82.43,107.51 88.783,107.51 93.043,103.25 98.25,103.25 100.121,103.25 102.371,105.5 IC3.67
PJ5: IC3.68 J20.6 | length 23.4
  Top Layer w0.3: J20.6 89.276,106.31 92.836,102.75 100.328,102.75 102.578,105 IC3.68
PJ6: IC3.69 J20.7 | length 26.1
  Top Layer w0.3: J20.7 82.46,105 89.879,105 92.629,102.25 100.536,102.25 102.786,104.5 IC3.69
PJ7: IC3.79 J20.8 | length 34.9
  Top Layer w0.3: J20.8 83.79,103.75 v1(88.5,103.75) ; v1(89.75,95.25) 90.75,96.25 106.25,96.25 108,98 IC3.79
  Bottom Layer w0.3: v1(88.5,103.75) 89.75,102.5 v1(89.75,95.25)
PK0: IC3.89 J19.10 | length 25.6
  Top Layer w0.3: J19.10 106.23,77.12 107.43,78.32 107.43,83.39 113,88.96 IC3.89
PK1: IC3.88 J19.9 | length 22.8
  Top Layer w0.3: J19.9 106.23,82.897 112.5,89.167 IC3.88
PK2: IC3.87 J19.12 | length 26.2
  Top Layer w0.3: J19.12 103.69,77.12 104.89,78.32 104.89,82.264 112,89.374 IC3.87
PK3: IC3.86 J19.11 | length 23.5
  Top Layer w0.3: J19.11 103.69,81.772 111.5,89.582 IC3.86
PK4: IC3.85 J19.14 | length 26.9
  Top Layer w0.3: J19.14 101.15,77.12 102.35,78.32 102.35,81.139 111,89.789 IC3.85
R\E\S\E\T\: IC3.30 J18.5 R3.1 | length 36.9
  Top Layer w0.3: IC3.30 116.5,116.5 117,117 121.75,117 128.5,123.75 128.5,142.31 J18.5
ROT_A: IC3.7 J1.5 | length 60.3
  Top Layer w0.3: J1.5 116.35,74.35 123.75,81.75 123.75,89.793 125.25,91.293 125.25,95 127.25,97 128.75,97 129.75,98 129.75,102.25 128.25,103.75 123.75,103.75 122.5,103.75 121.75,104.5 IC3.7
ROT_B: IC3.8 J1.6 | length 64.1
  Top Layer w0.3: J1.6 117.55,57.43 117.55,74.8 124.25,81.5 124.25,89.586 125.75,91.086 125.75,94.75 127.5,96.5 129,96.5 130.25,97.75 130.25,102.75 128.75,104.25 122.707,104.25 121.957,105 IC3.8
ROT_SW: IC3.6 J1.8 R1.1 | length 82.8
  Top Layer w0.3: IC3.6 121.5,104 122.25,103.25 127.75,103.25 129.25,101.75 129.25,98.25 128.5,97.5 127,97.5 124.75,95.25 124.75,91.5 123.25,90 123.25,82 112.61,71.36 112.61,57.43 J1.8 113.81,54.69 116.25,52.25 126.625,52.25 R1.1
SCK: IC3.20 J18.3 | length 40
  Top Layer w0.3: IC3.20 122.25,111 133.7,122.45 133.7,142.43 132.5,143.63 J18.3
pads on no net: IC1.24 IC2.2 IC2.3 IC2.6 IC2.8 IC2.9 IC2.10 IC2.11 IC2.12 IC2.13 IC2.14 IC2.19 IC2.22 IC2.23 IC2.24 IC2.27 IC2.28 IC3.1 IC3.2 IC3.4 IC3.5 IC3.9 IC3.14 IC3.15 IC3.16 IC3.17 IC3.18 IC3.19 IC3.23 IC3.24 IC3.25 IC3.26 IC3.27 IC3.28 IC3.29 IC3.42 IC3.51 IC3.52 IC3.70 IC4.1 J10.5 J19.1 J19.2

## Silkscreen, mask and mechanical layers (free items; w line width, h text height)
Top Overlay:
  circle w0.2: c145,55 r3
  circle w0.2: c145,145 r3
  circle w0.2: c55,145 r3
  circle w0.2: c55,55 r3
  text "DragonVideo" at 124,123.75 h2
  text "CamController" at 124,119.75 h2
  text "tortronik.de" at 93.75,86.75 h2
Mechanical 1:
  the board outline again, w0.02